# EAGLE board gesture_control_robot_rx (EAGLE 6.1)
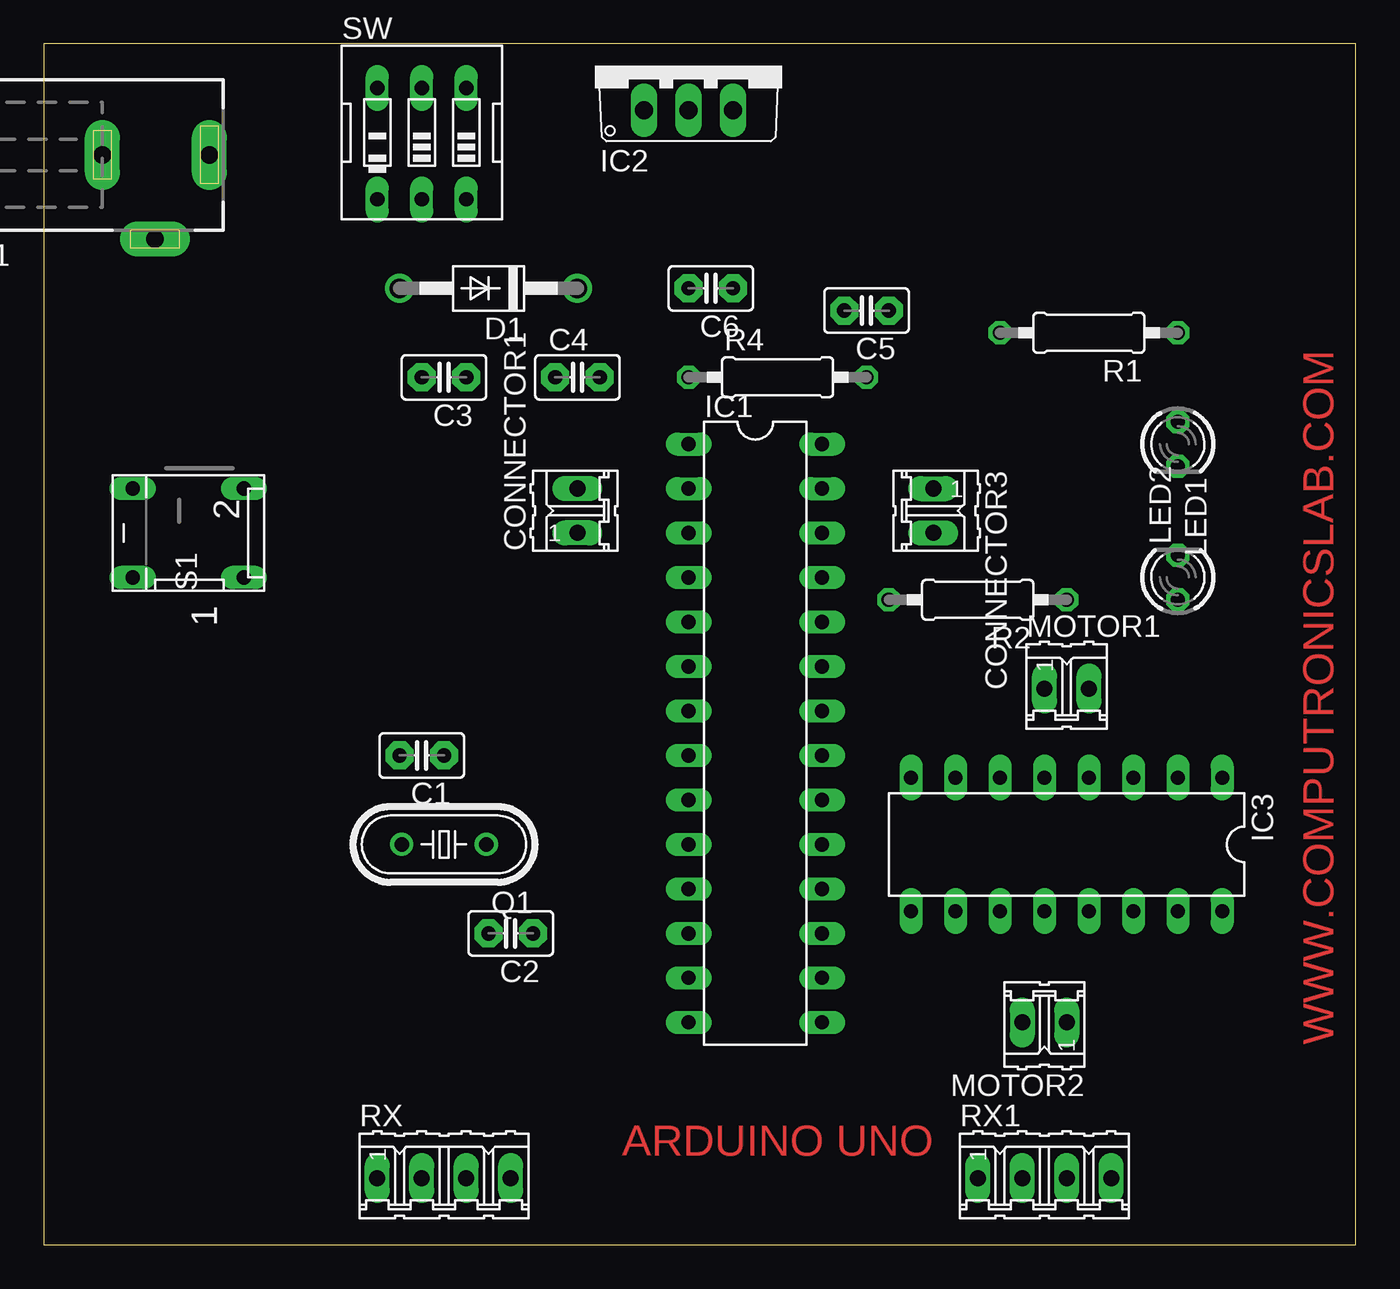
[diagram p0: board, top side]
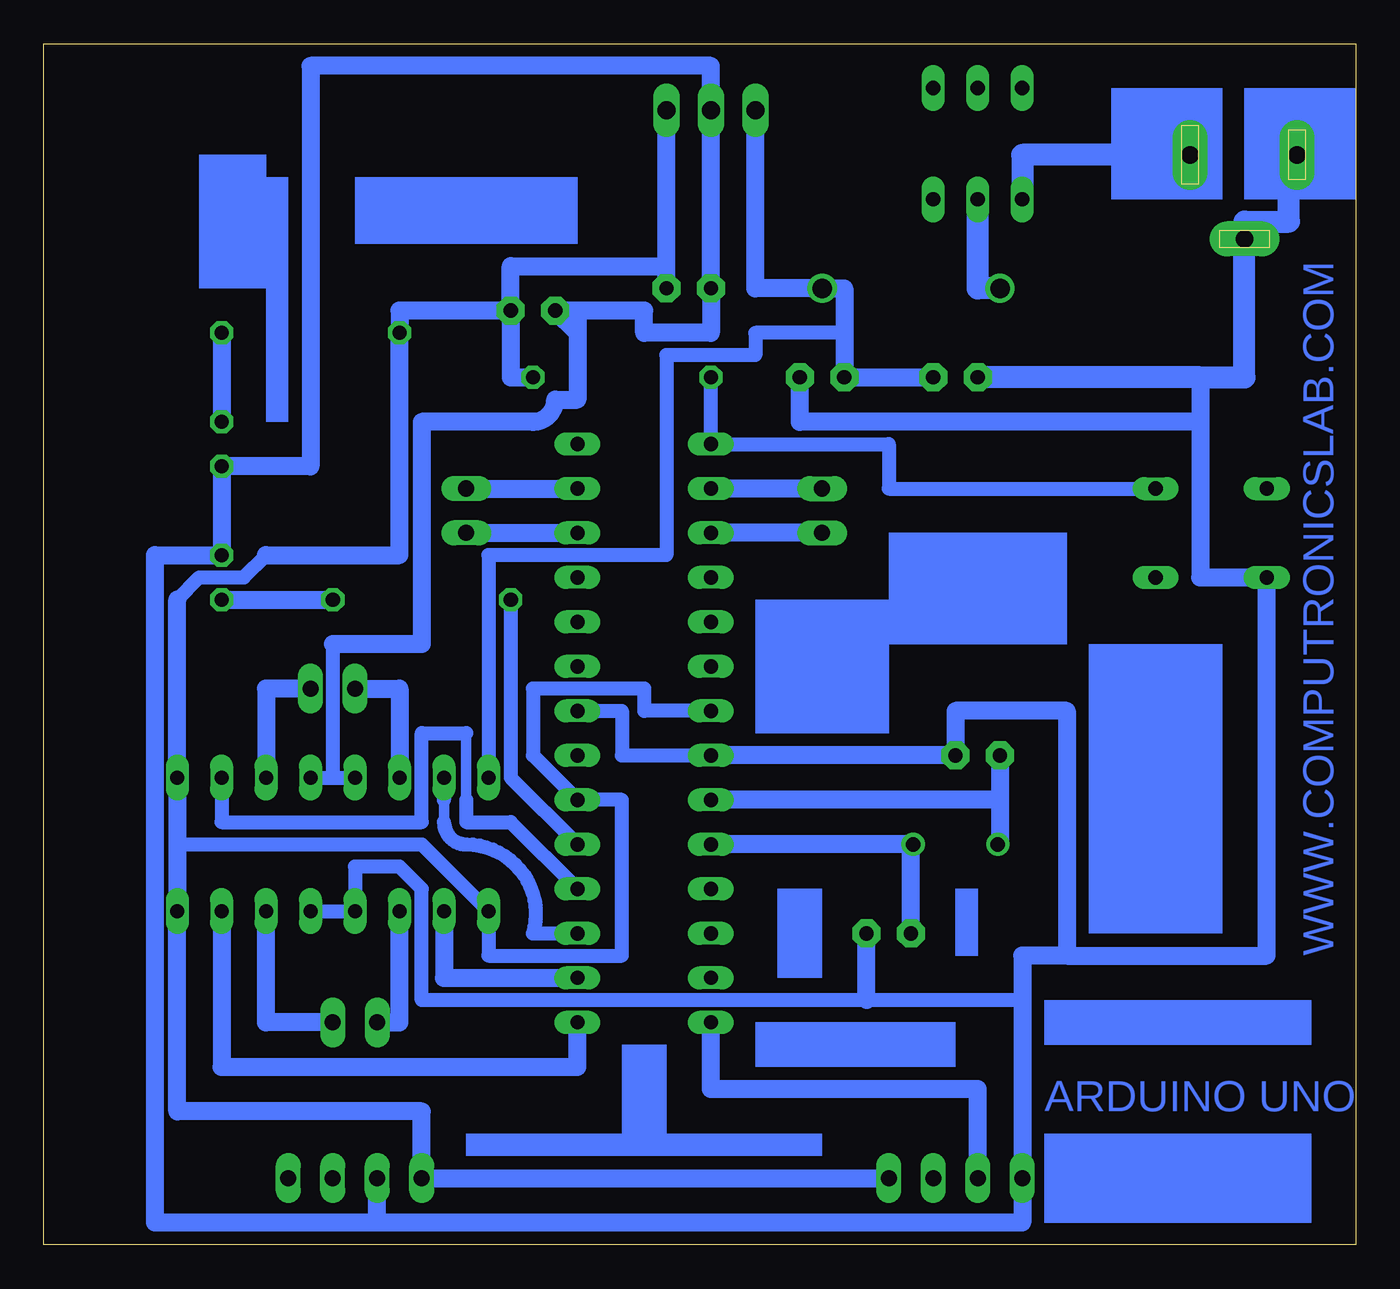
[diagram p1: board, bottom side, seen from below]

Size 74.93 x 68.57 mm. Coordinates in mm from the lower left corner, seen from the top.
Outline: 0,0 74.93,0 74.93,68.57 0,68.57 0,0
Copper layers (1*16): Top 0.035mm / dielectric 1.5mm / Bottom 0.035mm
Design rules: minimum track width 15mil, minimum drill 24mil, track to track 8mil, track to pad 8mil, pad to pad 8mil, via to via 8mil, smd to smd 8mil, copper to edge 40mil, drill to drill 8mil, minimum pad ring 10mil, minimum via ring 8mil, stop-mask expansion 4mil, vias tented up to drill 0mil, thermal gap 10mil

## Footprints (pad centres in the part's own frame; a part is rotated, then mirrored left to right if it is on the bottom)
C2.5-2 = drill 0.813 pad 1.6 octagon: 1 -1.27,0; 2 1.27,0
02P = drill 0.914 long: 1 -1.27,0; 2 1.27,0
DO41-10 = drill 1.118: A 5.08,0; C -5.08,0
DIL28-3 = drill 0.813 long: 1 -16.51,-3.81; 2 -13.97,-3.81; 3 -11.43,-3.81; 4 -8.89,-3.81; 5 -6.35,-3.81; 6 -3.81,-3.81; 7 -1.27,-3.81; 8 1.27,-3.81; 9 3.81,-3.81; 10 6.35,-3.81; 11 8.89,-3.81; 12 11.43,-3.81; 13 13.97,-3.81; 14 16.51,-3.81; 15 16.51,3.81; 16 13.97,3.81; 17 11.43,3.81; 18 8.89,3.81; 19 6.35,3.81; 20 3.81,3.81; 21 1.27,3.81; 22 -1.27,3.81; 23 -3.81,3.81; 24 -6.35,3.81; 25 -8.89,3.81; 26 -11.43,3.81; 27 -13.97,3.81; 28 -16.51,3.81
TO220V = drill 1.016 long: 1 -2.54,-2.54; 2 0,-2.54; 3 2.54,-2.54
DIL16 = drill 0.813 long: 1 -8.89,-3.81; 2 -6.35,-3.81; 3 -3.81,-3.81; 4 -1.27,-3.81; 5 1.27,-3.81; 6 3.81,-3.81; 7 6.35,-3.81; 8 8.89,-3.81; 9 8.89,3.81; 10 6.35,3.81; 11 3.81,3.81; 12 1.27,3.81; 13 -1.27,3.81; 14 -3.81,3.81; 15 -6.35,3.81; 16 -8.89,3.81
DCJ0303 = drill 1 pad 2 long: 1 0,3.1; 2 4.8,0; 3 0,-3
LED3MM = drill 0.813 octagon: A -1.27,0; K 1.27,0
HC49/S = drill 0.813: 1 -2.413,0; 2 2.413,0
0207/10 = drill 0.813 octagon: 1 -5.08,0; 2 5.08,0
04P = drill 0.914 long: 1 -3.81,0; 2 -1.27,0; 3 1.27,0; 4 3.81,0
DP-02 = drill 0.813 long: 1 -2.54,-2.54; 2 2.54,-2.54; 3 2.54,3.81; 4 -2.54,3.81
EDG-03 = drill 0.813 long: 1 -2.54,-3.81; 2 0,-3.81; 3 2.54,-3.81; 4 2.54,2.54; 5 0,2.54; 6 -2.54,2.54

## Placement (x,y rotation side)
C1  22pf  [C2.5-2]  21.59,27.94 180 top
C2  22pf  [C2.5-2]  26.67,17.78 180 top
C3  470uF  [C2.5-2]  22.86,49.53 180 top
C4  0.1uf  [C2.5-2]  30.48,49.53 0 top
C5  0.1uf  [C2.5-2]  46.99,53.34 180 top
C6  4.7uf  [C2.5-2]  38.1,54.61 180 top
CONNECTOR1  2 pin  [02P]  30.48,41.91 90 top
CONNECTOR3  [02P]  50.8,41.91 270 top
D1  1N4007  [DO41-10]  25.4,54.61 180 top
IC1  ATMEGA328  [DIL28-3]  40.64,29.21 270 top
IC2  7805  [TO220V]  36.83,67.31 0 top
IC3  L293D  [DIL16]  58.42,22.86 180 top
J1  [DCJ0303]  6.35,62.23 270 top
LED1  3mm  [LED3MM]  64.77,45.72 270 top
LED2  3mm  [LED3MM]  64.77,38.1 90 top
MOTOR1  [02P]  58.42,31.75 0 top
MOTOR2  [02P]  57.15,12.7 180 top
Q1  16MHZ  [HC49/S]  22.86,22.86 180 top
R1  220R  [0207/10]  59.69,52.07 180 top
R2  330R  [0207/10]  53.34,36.83 180 top
R4  10K  [0207/10]  41.91,49.53 0 top
RX  [04P]  22.86,3.81 0 top
RX1  [04P]  57.15,3.81 0 top
S1  push switch  [DP-02]  8.89,40.64 90 top
SW  on/of button  [EDG-03]  21.59,63.5 0 top

## Library data of the parts
C1-C6 = capacitor-wima
CONNECTOR1 CONNECTOR3 MOTOR1 MOTOR2 RX RX1 = con-amp-quick; OC_FARNELL: unknown; OC_NEWARK: unknown
D1 = diode
IC1 = quantum-research-group; OC_FARNELL: unknown; OC_NEWARK: unknown
IC2 = linear
IC3 = st-microelectronics; MPN: L293D; OC_FARNELL: 9589619; OC_NEWARK: 56P8249
J1 = con-jack; OC_FARNELL: unknown; OC_NEWARK: unknown
LED1 LED2 = led
Q1 = crystal; OC_FARNELL: 1667008; OC_NEWARK: unknown
R1 R2 R4 = rcl
S1 = switch-dil; MPN: MCDP02; OC_FARNELL: 1255233; OC_NEWARK: 26M1095
SW = special

## Nets
N$1: C1.2 IC1.9 Q1.2
N$2: C2.2 IC1.10 Q1.1
N$3: J1.1 SW.1
N$4: C3.1 C4.1 D1.C IC2.1 IC3.8
N$5: C1.1 C2.1 C3.2 C4.2 C5.2 C6.2 IC1.8 IC1.22 IC2.2 IC3.4 IC3.5 IC3.12 IC3.13 J1.2 J1.3 LED1.K LED2.K RX1.2 RX.1 S1.4
N$6: LED1.A R1.1
N$7: IC1.17 IC3.7
N$8: CONNECTOR1.1 IC1.3
N$9: CONNECTOR1.2 IC1.2
N$10: IC1.6
N$11: IC1.5
N$12: CONNECTOR3.1 IC1.27
N$13: CONNECTOR3.2 IC1.26
N$14: IC1.14 RX.2
N$15: IC1.18 IC3.2
N$16: IC1.15 IC3.15
N$17: D1.A SW.2
N$21: IC1.16 IC3.10
N$25: IC3.14 MOTOR2.1
N$27: IC1.19 R2.2
N$28: IC3.11 MOTOR2.2
N$31: IC1.1 R4.1 S1.2
N$32: LED2.A R2.1
N$33: C5.1 C6.1 IC1.7 IC1.20 IC2.3 IC3.1 IC3.9 IC3.16 R1.2 R4.2 RX1.1 RX.4
N$34: IC3.6 MOTOR1.1
N$35: IC3.3 MOTOR1.2

## Tracks (layer width: path | path; a pad name or v marks a point on that pad's centre or on a via)
N$1
  Bottom 0.381: 20.32,22.86 Q1.2
  Bottom 1.016: C1.2 20.32,25.4 | 20.32,25.4 20.32,22.86 | 20.32,25.4 IC1.9
N$2
  Bottom 0.381: 25.4,22.86 Q1.1
  Bottom 1.016: C2.2 25.4,22.86 IC1.10
N$3
  Bottom 1.27: SW.1 19.05,62.23 J1.1
N$4
  Bottom 0.813: IC3.8 49.53,39.37 39.37,39.37 39.37,50.8 34.29,50.8 34.29,52.07 29.21,52.07
  Bottom 1.016: C3.1 C4.1 29.21,52.07 29.21,54.61 D1.C 34.29,54.61 IC2.1
N$5
  Bottom 0.381: C5.2 44.45,53.34
  Bottom 0.813: IC3.4 58.42,26.67 | 58.42,26.67 IC3.5 | 58.42,34.29 58.42,26.67 | IC1.8 41.91,27.94 41.91,30.48 IC1.22 | IC3.13 IC3.12 57.15,21.59 54.61,21.59 53.34,20.32 53.34,13.97 27.94,13.97 19.05,13.97
  Bottom 1.016: 44.45,52.07 C5.2 40.64,53.34 40.64,52.07 36.83,52.07 C6.2 IC2.2 36.83,67.31 59.69,67.31 59.69,44.45 LED1.K LED2.K 68.58,39.37 68.58,1.27 55.88,1.27 | 58.42,34.29 53.34,34.29 53.34,46.99 46.99,46.99 arc-90 45.72,48.26 44.45,48.26 44.45,53.34 | 8.89,49.53 8.89,46.99 | 8.89,46.99 8.89,38.1 S1.4 5.08,16.51 16.51,16.51 | C4.2 31.75,46.99 8.89,46.99 | 16.51,16.51 19.05,16.51 19.05,13.97 RX.1 19.05,1.27 55.88,1.27 | 55.88,1.27 RX1.2 | 27.94,13.97 C2.1 | IC1.8 C1.1 22.86,30.48 16.51,30.48 16.51,16.51
  Bottom 1.27: C3.2 8.89,49.53 6.35,49.53 J1.2 6.35,58.42 3.81,58.42 3.81,62.23 J1.3
N$6
  Bottom 1.016: R1.1 LED1.A
N$7
  Bottom 0.61: 52.07,25.4 52.07,24.13
  Bottom 0.813: 52.07,24.13 arc-90 50.8,22.86 arc106 46.99,17.78 IC1.17 | IC3.7 52.07,25.4
N$8
  Bottom 1.016: CONNECTOR1.1 IC1.3
N$9
  Bottom 1.016: CONNECTOR1.2 IC1.2
N$12
  Bottom 1.016: CONNECTOR3.1 IC1.27
N$13
  Bottom 1.016: CONNECTOR3.2 IC1.26
N$14
  Bottom 1.016: IC1.14 36.83,8.89 21.59,8.89 RX.2
N$15
  Bottom 0.61: 50.8,29.21 50.8,25.4
  Bottom 0.813: IC1.18 48.26,24.13 50.8,24.13 50.8,25.4 | 50.8,29.21 53.34,29.21 53.34,24.13 64.77,24.13 IC3.2
N$16
  Bottom 1.016: IC1.15 44.45,10.16 64.77,10.16 IC3.15
N$17
  Bottom 1.27: SW.2 21.59,54.61 D1.A
N$21
  Bottom 0.381: 52.07,16.51 52.07,15.24
  Bottom 1.016: IC3.10 52.07,15.24 IC1.16
N$25
  Bottom 1.016: IC3.14 62.23,12.7 MOTOR2.1
N$27
  Bottom 0.813: IC1.19 48.26,26.67 R2.2
N$28
  Bottom 1.016: IC3.11 54.61,12.7 MOTOR2.2
N$31
  Bottom 0.813: S1.2 26.67,43.18 26.67,45.72 IC1.1 R4.1
N$32
  Bottom 1.016: LED2.A R2.1
N$33
  Bottom 0.381: 39.37,57.15 39.37,55.88 C6.1
  Bottom 0.813: IC1.7 40.64,30.48 40.64,31.75 46.99,31.75 46.99,27.94 IC1.20 41.91,25.4 41.91,16.51 49.53,16.51 IC3.9 53.34,22.86 67.31,22.86 | 62.23,39.37 63.5,38.1 66.04,38.1 67.31,36.83
  Bottom 1.016: C6.1 IC2.3 | R4.2 48.26,49.53 C5.1 | C5.1 54.61,53.34 R1.2 54.61,39.37 62.23,39.37 | 39.37,55.88 48.26,55.88 C5.1 | RX.4 RX1.1 53.34,7.62 67.31,7.62 IC3.16 67.31,22.86 IC3.1 67.31,36.83
N$34
  Bottom 1.016: IC3.6 54.61,31.75 MOTOR1.1
N$35
  Bottom 1.016: IC3.3 62.23,31.75 MOTOR1.2
(copper drawn outside any net)
  shapes: Bottom area x17

## Text on the board
Top: WWW.COMPUTRONICSLAB.COM | ARDUINO UNO
Bottom: WWW.COMPUTRONICSLAB.COM | ARDUINO UNO